# EAGLE board BMSNodeV1 (EAGLE 7.6.0)
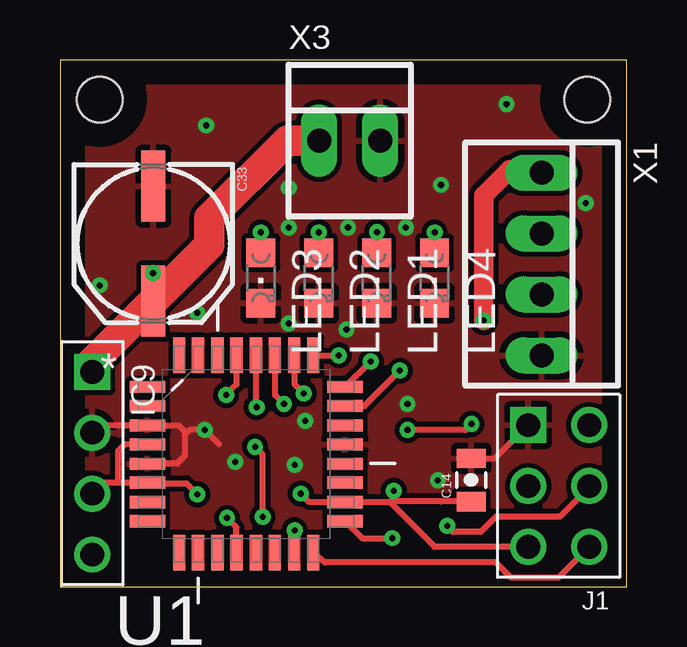
[diagram p0: board, top side]
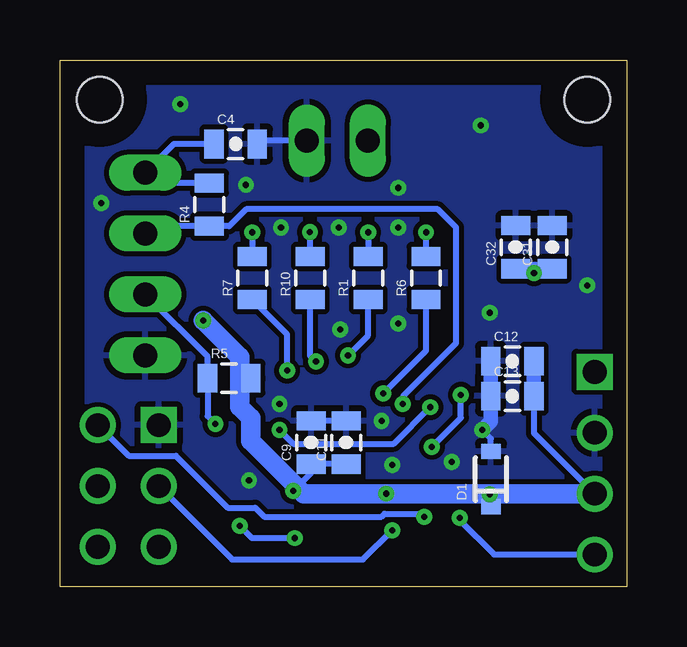
[diagram p1: board, bottom side, seen from below]

Size 23.62 x 21.97 mm. Coordinates in mm from the lower left corner, seen from the top.
Outline: 0,0 23.62,0 23.62,21.97 0,21.97 0,0
Copper layers (1*16): Top 0.035mm / dielectric 1.5mm / Bottom 0.035mm
Design rules "default": minimum track width 10mil, minimum drill 24mil, track to track 8mil, track to pad 8mil, pad to pad 8mil, via to via 8mil, smd to smd 8mil, copper to edge 40mil, drill to drill 8mil, minimum pad ring 10mil, minimum via ring 8mil, stop-mask expansion 4mil, vias tented up to drill 0mil, thermal gap 10mil
Holes 1.91 mm at 1.65,20.32 21.97,20.32

## Footprints (pad centres in the part's own frame; a part is rotated, then mirrored left to right if it is on the bottom)
0805-CAP = smd 0.8 x 1.2: 1 -0.9,0; 2 0.9,0
NIPPON_F80 = smd 2.95 x 1: + 2.4,0; - -2.4,0
SOD-323 = smd 0.63 x 0.83: A 1.15,0; C -1.15,0
4PIN_.1' = drill 0.991 square: P$1 -3.81,0 | drill 0.991: P$2 -1.27,0; P$3 1.27,0; P$4 3.81,0
2X3PIN_.1' = drill 0.991: P$1 -1.27,1.27; P$2 1.27,1.27; P$3 -1.27,-1.27; P$4 1.27,-1.27; P$5 -1.27,-3.81 | drill 0.991 square: P$6 1.27,-3.81
CHIPLED_0805 = smd 1.2 x 1.2: A 0,-1.05; C 0,1.05
0805 = smd 0.8 x 1.2: 1 -0.9,0; 2 0.9,0
QFP80P900X900X120-32N = smd 1.473 x 0.508: 1 -4.115,2.794; 2 -4.115,2.007; 3 -4.115,1.194; 4 -4.115,0.406; 5 -4.115,-0.406; 6 -4.115,-1.194; 7 -4.115,-2.007; 8 -4.115,-2.794; 17 4.115,-2.794; 18 4.115,-2.007; 19 4.115,-1.194; 20 4.115,-0.406; 21 4.115,0.406; 22 4.115,1.194; 23 4.115,2.007; 24 4.115,2.794 | smd 0.508 x 1.473: 9 -2.794,-4.115; 10 -2.007,-4.115; 11 -1.194,-4.115; 12 -0.406,-4.115; 13 0.406,-4.115; 14 1.194,-4.115; 15 2.007,-4.115; 16 2.794,-4.115; 25 2.794,4.115; 26 2.007,4.115; 27 1.194,4.115; 28 0.406,4.115; 29 -0.406,4.115; 30 -1.194,4.115; 31 -2.007,4.115; 32 -2.794,4.115
22-23-2041 = drill 1 long: 1 -3.81,0; 2 -1.27,0; 3 1.27,0; 4 3.81,0
22-23-2021 = drill 1 long: 1 -1.27,0; 2 1.27,0

## Placement (x,y rotation side)
C4  10uF  [0805-CAP]  16.31,18.47 0 bottom
C9  1uF  [0805-CAP]  13.16,6.02 90 bottom
C11  0.1uF  [0805-CAP]  11.7,6.02 90 bottom
C12  0.1uF  [0805-CAP]  4.78,9.41 0 bottom
C13  1uF  [0805-CAP]  4.78,7.95 0 bottom
C14  1uF  [0805-CAP]  17.13,4.46 90 top
C31  0.1uF  [0805-CAP]  3.11,14.16 90 bottom
C32  1uF  [0805-CAP]  4.64,14.16 90 bottom
C33  33uF  [NIPPON_F80]  3.89,14.31 270 top
D1  5.6V  [SOD-323]  5.66,4.5 90 bottom
IC9  5VBUCK_DANNY_CUSTOM_PCB  [4PIN_.1']  1.35,5.16 270 top
J1  ISPHEADER  [2X3PIN_.1']  20.78,2.93 180 top
LED1  [CHIPLED_0805]  13.2,12.88 180 top
LED2  [CHIPLED_0805]  10.78,12.88 180 top
LED3  [CHIPLED_0805]  8.37,12.88 180 top
LED4  [CHIPLED_0805]  15.61,12.88 180 top
R1  1k  [0805]  10.78,12.88 90 bottom
R4  10k  [0805]  17.4,15.94 90 bottom
R5  10k  [0805]  16.57,8.7 0 bottom
R6  1k  [0805]  8.37,12.88 90 bottom
R7  1k  [0805]  15.61,12.88 90 bottom
R10  1k  [0805]  13.2,12.88 90 bottom
U1  ATMEGA328P-AU  [QFP80P900X900X120-32N]  7.76,5.54 0 top
X1  22-23-2041  [22-23-2041]  20.07,13.46 270 top
X3  22-23-2021  [22-23-2021]  12.06,18.61 0 top

## Library data of the parts
C4 = SparkFun-Capacitors; PROD_ID: CAP-11330
C9 C11-C14 C31 C32 = SparkFun-Capacitors; PROD_ID: CAP-08469
C33 = SparkFun-Capacitors
D1 = SparkFun-DiscreteSemi; PROD_ID: DIO-12442
IC9 J1 = lolomolo
LED1-LED4 = adafruit
R1 R4-R7 R10 = SparkFun-Resistors; PROD_ID: RES-11622
U1 = Atmel_By_element14_Batch_1-00; MPN: ATMEGA328P-AU; OC_FARNELL: 1715486; OC_NEWARK: 14R4631; PACKAGE: TQFP-32; SUPPLIER: Atmel
X1 = con-molex; MF: MOLEX; MPN: 22-23-2041; OC_FARNELL: 1462920; OC_NEWARK: 38C0355
X3 = con-molex; MF: MOLEX; MPN: 22-23-2021; OC_FARNELL: 1462926; OC_NEWARK: 25C3832

## Nets
5V: C4.1 C9.1 C11.1 C12.2 C13.2 C14.1 D1.C IC9.P$3 J1.P$2 R4.2 R5.2 U1.4 U1.6 U1.18 X1.1
GND: C4.2 C9.2 C11.2 C12.1 C13.1 C14.2 C31.2 C32.2 C33.- D1.A IC9.P$2 J1.P$6 LED1.C LED2.C LED3.C LED4.C U1.3 U1.5 U1.21 X1.4 X3.2
LEDG1: R7.1 U1.23
LEDG2: R10.1 U1.24
LEDR: R6.1 U1.26
LEDY: R1.1 U1.25
MISO: J1.P$1 U1.16
MOSI: J1.P$4 U1.15
N$1: LED2.A R1.2
N$2: LED3.A R6.2
N$3: LED4.A R7.2
N$19: LED1.A R10.2
RESET: J1.P$5 U1.29
SCK: J1.P$3 U1.17
SCL: R5.1 U1.28 X1.3
SDA: R4.1 U1.27 X1.2
SHDN: IC9.P$4 U1.12
VBAT: C31.1 C32.1 C33.+ IC9.P$1 X3.1

## Tracks (layer width: path | path; a pad name or v marks a point on that pad's centre or on a via)
5V  (via drill 0.25)
  Top 0.254: J1.P$2 15.61,1.66 13.78,3.49 | 13.78,3.49 13.84,3.56 15.87,3.56 C14.1 | 13.78,3.49 13.74,3.53 | 13.74,3.53 U1.18 10.39,3.53 v10.03,3.89 | 2.41,4.34 U1.6 3.67,4.32 5.26,4.32 v5.72,3.86 | U1.4 2.71,5.94 2.41,5.65 2.41,4.34 | v13.91,4 13.91,3.7 13.74,3.53 | 2.41,4.34 1.8,4.34 IC9.P$3
  Top 0.813: v17.65,11.11 17.65,16.32 18.61,17.27 X1.1 18.73,17.4
  Bottom 0.254: D1.C 5.66,3.79 v5.72,3.86 5.72,3.96 | R4.2 19.7,16.84 X1.1 18.87,18.47 C4.1 | R5.2 15.62,8.69 | C11.1 C9.1 13.16,4.75 v13.91,4 | C13.2 3.88,6.42 IC9.P$3
  Bottom 0.61: C12.2 C13.2
  Bottom 0.813: IC9.P$3 v10.03,3.89 13.47,3.89 15.68,6.1 15.68,7.05 16.13,7.49 16.13,8.64 | 16.13,8.64 16.13,9.59 v17.65,11.11 | R5.2 16.07,8.7 16.13,8.64
GND  (via drill 0.25)
  Top 0.254: IC9.P$2 1.65,6.73 U1.3 4.95,6.73 5.21,6.48 5.21,6.35 | 5.21,6.35 5.21,5.46 4.89,5.14 3.66,5.14 U1.5 | 5.21,6.35 5.4,6.54 v6.03,6.54 6.63,5.94 | C14.2 18.12,5.36 J1.P$6
  Bottom 0.254: D1.A 5.66,6.17 v6.03,6.54 | C11.2 C9.2 | X3.2 15.27,18.61 C4.2
  Bottom 0.61: C12.1 C13.1 5.67,6.9 v6.03,6.54
  other vias: 7.3,5.21 5.71,11.43 11.94,10.73 6.1,19.24 1.65,12.57 21.91,16 18.61,20.13 14.41,14.99 12,14.99 9.53,14.99 9.53,10.99 10.22,6.92 14.48,7.62 15.75,4.45 9.78,5.08 9.53,16.64 15.88,16.76
  pour Bottom: 0,0 23.62,0 23.62,22.1 0,22.1
  pour Top: 0,0 23.62,0 23.62,22.1 0,22.1
LEDG1  (via drill 0.25)
  Top 0.254: U1.23 12.69,7.54 v14.16,9.02
  Bottom 0.254: v14.16,9.02 14.16,10.53 R7.1
LEDG2  (via drill 0.25)
  Top 0.254: U1.24 v12.94,9.4 v12.95,9.4
  Bottom 0.254: v12.95,9.4 13.2,9.64 R10.1
LEDR  (via drill 0.25)
  Top 0.254: U1.26 9.77,8.46 v10.16,8.06
  Bottom 0.254: v10.16,8.06 8.37,9.86 R6.1
LEDY  (via drill 0.25)
  Top 0.254: U1.25 v11.62,9.65
  Bottom 0.254: v11.62,9.65 10.78,10.49 R1.1
MISO
  Top 0.254: J1.P$1 20.77,0.38 18.8,0.38 18.16,1.02 11.04,1.02 U1.16
MOSI  (via drill 0.25)
  Top 0.254: U1.15 9.78,1.05 v9.78,2.36
  Bottom 0.254: J1.P$4 16.45,1.14 11,1.14 v9.78,2.36
N$1  (via drill 0.25)
  Top 0.254: LED2.A v10.78,14.78
  Bottom 0.254: v10.78,14.78 R1.2
N$2  (via drill 0.25)
  Top 0.254: v8.37,14.78 LED3.A
  Bottom 0.254: R6.2 v8.37,14.78
N$3  (via drill 0.25)
  Top 0.254: LED4.A v15.61,14.78
  Bottom 0.254: v15.61,14.78 R7.2
N$19  (via drill 0.25)
  Top 0.254: LED1.A 13.2,14.81 v13.21,14.8
  Bottom 0.254: v13.21,14.8 13.21,13.77 R10.2
RESET  (via drill 0.25)
  Top 0.254: U1.29 7.35,8.43 v6.92,8 | v8.45,2.92 8.45,5.52 v8.13,5.84
  Bottom 0.254: J1.P$5 20.77,5.46 18.8,5.46 16.64,3.3 15.49,3.3 15.11,2.92 10.22,2.92 10.1,3.05 8.57,3.05 v8.45,2.92 | v6.92,8 6.92,7.05 v8.13,5.84
SCK  (via drill 0.25)
  Top 0.254: J1.P$3 22.05,4.14 20.83,2.92 18.16,2.92 17.53,2.29 16.38,2.29 v16.13,2.54 | U1.17 12.59,2.03 v13.84,2.03
  Bottom 0.254: v13.84,2.03 15.62,2.03 v16.13,2.54
SCL  (via drill 0.25)
  Top 0.254: U1.28 8.17,7.52 v8.19,7.49 | v17.14,6.79 16.89,6.54 v14.48,6.54
  Bottom 0.254: X1.3 17.47,9.6 R5.1 17.47,7.12 v17.14,6.79 | v8.19,7.49 9.72,5.97 13.91,5.97 v14.48,6.54
SDA  (via drill 0.25)
  Top 0.254: U1.27 8.95,8 v9.34,7.62
  Bottom 0.254: X1.2 19.7,15.04 R4.1 16.57,15.04 15.86,15.75 7.87,15.75 7.11,14.99 7.11,10.16 9.34,7.94 v9.34,7.62
SHDN  (via drill 0.25)
  Top 0.254: U1.12 7.35,2.48 v6.96,2.87
  Bottom 0.254: v6.96,2.87 6.96,2.77 5.54,1.35 IC9.P$4
VBAT  (via drill 0.25)
  Top 0.61: v3.87,13.08 3.9,12.8 C33.+
  Top 1.27: IC9.P$1 1.35,9.37 C33.+ 6.22,14.25 6.22,15.37 9.46,18.61 X3.1
  Bottom 0.61: C32.1 C31.1 3.81,13.2 v3.87,13.08